# EAGLE board Replicape_A4 (EAGLE 6.5.0), part 1 of 2
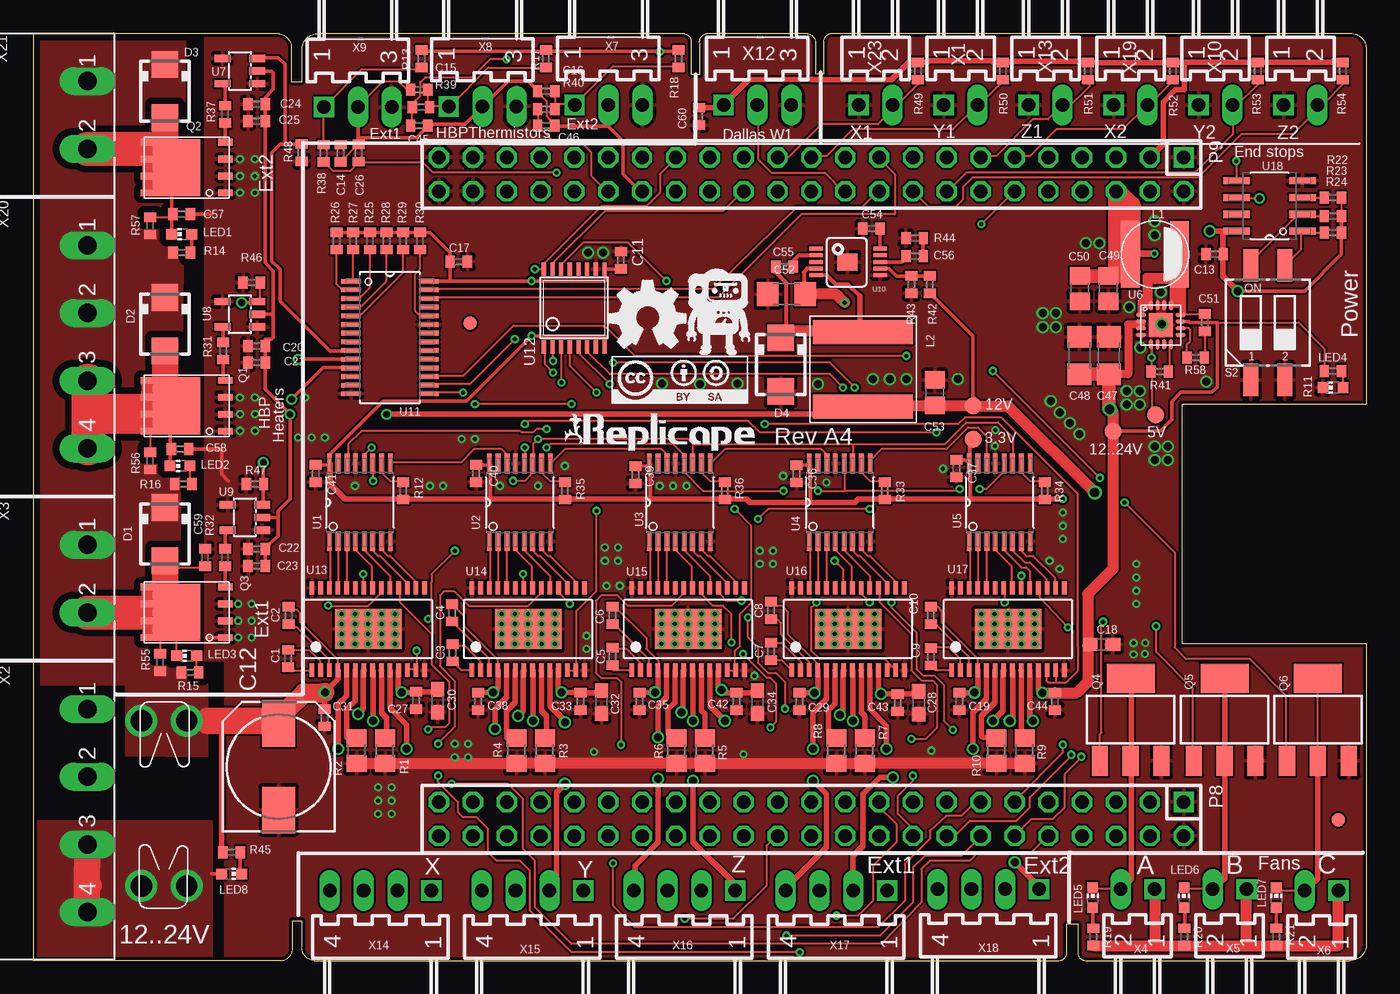
[diagram p0: board, top side]
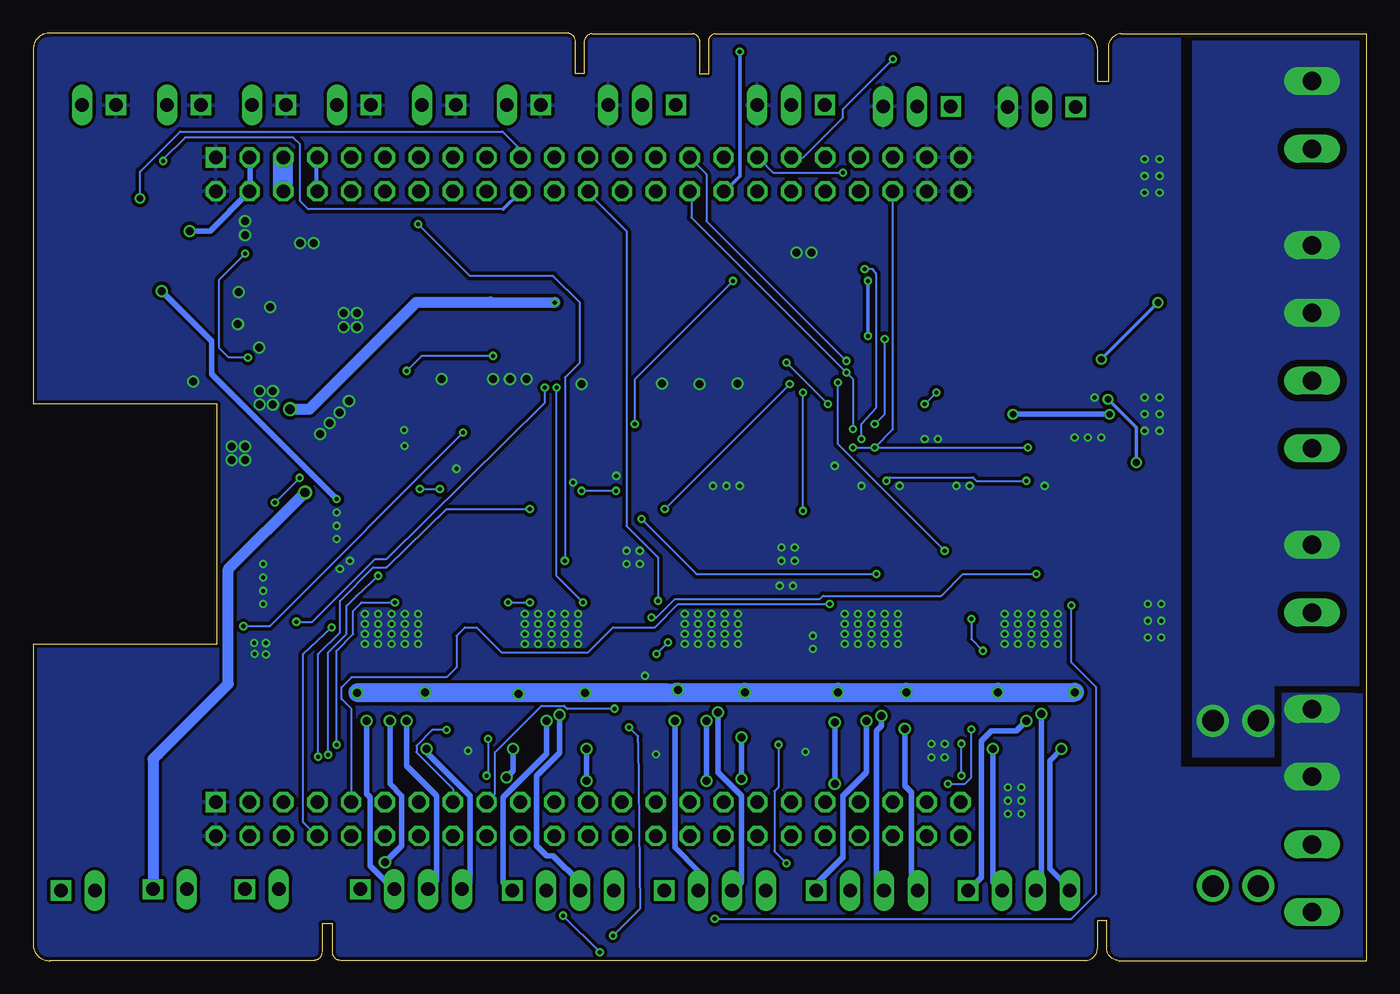
[diagram p1: board, bottom side, seen from below]

Size 100 x 69.58 mm. Coordinates in mm from the lower left corner, seen from the top.
Outline: 19.45,3 20.15,3 20.15,1.05 arc90 21.05,0 76.95,0 arc90 77.55,0.65 77.55,2.75 78.35,2.75 78.35,0.65 arc90 78.95,0 98.75,0 arc90 100,1.1 100,23.75 86.19,23.75 86.19,41.75 100,41.75 100,68.5 arc90 98.75,69.58 59.88,69.58 arc90 59.33,68.9 59.33,66.55 58.67,66.55 58.67,68.85 arc90 58.08,69.55 50.5,69.55 arc90 50,68.85 50,66.5 49.35,66.5 49.35,68.85 arc90 48.85,69.55 21.35,69.55 arc90 20.15,68.35 20.15,65.95 19.35,65.95 19.35,68.35 arc90 18.43,69.55 0,69.55 0,0 18.6,0 arc90 19.45,0.95 19.45,3
Copper layers (1*16): Top 0.035mm / dielectric 1.5mm / Bottom 0.035mm
Design rules "default": minimum track width 6mil, minimum drill 12mil, track to track 6mil, track to pad 6mil, pad to pad 6mil, via to via 6mil, smd to smd 0mil, copper to edge 10mil, drill to drill 10mil, minimum pad ring 10mil, minimum via ring 6mil, stop-mask expansion 2mil, vias tented up to drill 100mil, thermal gap 10mil
Net classes: 1 power: width 1.27 mm

## Footprints (pad centres in the part's own frame; a part is rotated, then mirrored left to right if it is on the bottom)
B1,27 = smd 1.27 x 1.27: TP 0,0
C0402 = smd 0.7 x 0.9: 1 -0.65,0; 2 0.65,0
140CLH-0810 = smd 3.5 x 2.5: + 3.25,0; - -3.25,0
C0603 = smd 1.1 x 1: 1 -0.85,0; 2 0.85,0
C1206 = smd 1.6 x 1.8: 1 -1.4,0; 2 1.4,0
C0805 = smd 1.3 x 1.5: 1 -0.95,0; 2 0.95,0
SMA = smd 2 x 2: A 2,0; C -2,0
3557 = drill 1.6: 1 -6.2,1.7; 2 -6.2,-1.7; 3 6.2,-1.7; 4 6.2,1.7
FIDUCIAL-1X2.5 = smd 1 x 1: 1 0,0
VLC5020 = smd 5 x 1.4: 1 0,1.85; 2 0,-1.85
NR8040T330 = smd 1.8 x 7.5: P$1 2.8,0; P$2 -2.8,0
CHIP-LED0603 = smd 0.8 x 0.8: A 0,-0.75; C 0,0.75
DIL-100-2X23 = drill 1.016 square: 1 -27.94,-1.27 | drill 1.016 octagon: 2 -27.94,1.27; 3 -25.4,-1.27; 4 -25.4,1.27; 5 -22.86,-1.27; 6 -22.86,1.27; 7 -20.32,-1.27; 8 -20.32,1.27; 9 -17.78,-1.27; 10 -17.78,1.27; 11 -15.24,-1.27; 12 -15.24,1.27; 13 -12.7,-1.27; 14 -12.7,1.27; 15 -10.16,-1.27; 16 -10.16,1.27; 17 -7.62,-1.27; 18 -7.62,1.27; 19 -5.08,-1.27; 20 -5.08,1.27; 21 -2.54,-1.27; 22 -2.54,1.27; 23 0,-1.27; 24 0,1.27; 25 2.54,-1.27; 26 2.54,1.27; 27 5.08,-1.27; 28 5.08,1.27; 29 7.62,-1.27; 30 7.62,1.27; 31 10.16,-1.27; 32 10.16,1.27; 33 12.7,-1.27; 34 12.7,1.27; 35 15.24,-1.27; 36 15.24,1.27; 37 17.78,-1.27; 38 17.78,1.27; 39 20.32,-1.27; 40 20.32,1.27; 41 22.86,-1.27; 42 22.86,1.27; 43 25.4,-1.27; 44 25.4,1.27; 45 27.94,-1.27; 46 27.94,1.27
8-DFN-EP-(5X6) = smd 1.1 x 0.5: 1 -2.9,1.905; 2 -2.9,0.635; 3 -2.9,-0.635; 4 -2.9,-1.905; 5 2.9,-1.905; 6 2.9,-0.635; 7 2.9,0.635; 8 2.9,1.905 | smd 3.5 x 4.3: TH 0.75,0
SOT223 = smd 1.219 x 2.235: 1 -2.311,-3.099; 2 0,-3.099; 3 2.311,-3.099 | smd 3.6 x 2.2: 4 0,3.099
R0805 = smd 1.3 x 1.5: 1 -0.95,0; 2 0.95,0
R0402 = smd 0.7 x 0.9: 1 -0.65,0; 2 0.65,0
CTS-219-02 = smd 1.13 x 2.44: 1 -1.27,-4.3; 2 1.27,-4.3; 3 1.27,4.3; 4 -1.27,4.3
SOP65P640X120-16N = smd 1.473 x 0.356: 1 -2.921,2.286; 2 -2.921,1.626; 3 -2.921,0.965; 4 -2.921,0.33; 5 -2.921,-0.33; 6 -2.921,-0.965; 7 -2.921,-1.626; 8 -2.921,-2.286; 9 2.921,-2.286; 10 2.921,-1.626; 11 2.921,-0.965; 12 2.921,-0.33; 13 2.921,0.33; 14 2.921,0.965; 15 2.921,1.626; 16 2.921,2.286
QFN-16 = smd 0.75 x 0.3: 1 -1.475,0.75; 2 -1.475,0.25; 3 -1.475,-0.25; 4 -1.475,-0.75; 9 1.475,-0.75; 10 1.475,-0.25; 11 1.475,0.25; 12 1.475,0.75 | smd 0.3 x 0.75: 5 -0.75,-1.475; 6 -0.25,-1.475; 7 0.25,-1.475; 8 0.75,-1.475; 13 0.75,1.475; 14 0.25,1.475; 15 -0.25,1.475; 16 -0.75,1.475 | smd 1.8 x 1.8: P$17 0,0
SOT23-5L = smd 0.55 x 1.2: 1 -0.95,-1.3; 2 0,-1.3; 3 0.95,-1.3; 4 0.95,1.3; 5 -0.95,1.3
MSOP10 = smd 0.3 x 1: 1 -1,-2.4; 2 -0.5,-2.4; 3 0.005,-2.4; 4 0.5,-2.4; 5 1,-2.4; 6 1,2.4; 7 0.5,2.4; 8 0.005,2.4; 9 -0.5,2.4; 10 -1,2.4 | smd 1.3 x 1.5: EP 0.02,-0.04
SOP65P640X110-28N = smd 1.473 x 0.356: 1 -2.921,4.216; 2 -2.921,3.581; 3 -2.921,2.921; 4 -2.921,2.286; 5 -2.921,1.626; 6 -2.921,0.965; 7 -2.921,0.33; 8 -2.921,-0.33; 9 -2.921,-0.965; 10 -2.921,-1.626; 11 -2.921,-2.286; 12 -2.921,-2.921; 13 -2.921,-3.581; 14 -2.921,-4.216; 15 2.921,-4.216; 16 2.921,-3.581; 17 2.921,-2.921; 18 2.921,-2.286; 19 2.921,-1.626; 20 2.921,-0.965; 21 2.921,-0.33; 22 2.921,0.33; 23 2.921,0.965; 24 2.921,1.626; 25 2.921,2.286; 26 2.921,2.921; 27 2.921,3.581; 28 2.921,4.216
TSSOP-16 = smd 0.305 x 0.991: 1 -2.275,-2.918; 2 -1.625,-2.918; 3 -0.975,-2.918; 4 -0.325,-2.918; 5 0.325,-2.918; 6 0.975,-2.918; 7 1.625,-2.918; 8 2.275,-2.918; 9 2.275,2.918; 10 1.625,2.918; 11 0.975,2.918; 12 0.325,2.918; 13 -0.325,2.918; 14 -0.975,2.918; 15 -1.625,2.918; 16 -2.275,2.918
TSSOP-28 = smd 0.35 x 1: 1 -4.225,-3.087; 2 -3.575,-3.087; 3 -2.925,-3.087; 4 -2.275,-3.087; 5 -1.625,-3.087; 6 -0.975,-3.087; 7 -0.325,-3.087; 8 0.325,-3.087; 9 0.975,-3.087; 10 1.625,-3.087; 11 2.275,-3.087; 12 2.925,-3.087; 13 3.575,-3.087; 14 4.225,-3.087; 15 4.225,3.087; 16 3.575,3.087; 17 2.925,3.087; 18 2.275,3.087; 19 1.625,3.087; 20 0.975,3.087; 21 0.325,3.087; 22 -0.325,3.087; 23 -0.975,3.087; 24 -1.625,3.087; 25 -2.275,3.087; 26 -2.925,3.087; 27 -3.575,3.087; 28 -4.225,3.087 | smd 5 x 3: EXP 0,0
SOIC127P600X175-8N = smd 1.981 x 0.533: 1 -2.464,1.905; 2 -2.464,0.635; 3 -2.464,-0.635; 4 -2.464,-1.905; 5 2.464,-1.905; 6 2.464,-0.635; 7 2.464,0.635; 8 2.464,1.905
7395-02 = drill 1.016 square: 1 1.27,0 | drill 1.016 long: 2 -1.27,0
MSTBA4 = drill 1.397 long: 1 -7.62,5.08; 2 -2.54,5.08; 3 2.54,5.08; 4 7.62,5.08
MSTBA2 = drill 1.397 long: 1 -2.54,5.08; 2 2.54,5.08
7395-03 = drill 1.016 square: 1 2.54,0 | drill 1.016 long: 2 0,0; 3 -2.54,0
7395-04 = drill 1.016 square: 1 3.81,0 | drill 1.016 long: 2 1.27,0; 3 -1.27,0; 4 -3.81,0

## Placement (x,y rotation side)
3.3V  TPB1,27  [B1,27]  70.5,39.13 0 top
5V  TPB1,27  [B1,27]  84.2,40.95 0 top
12..24V  TPB1,27  [B1,27]  81,39.7 0 top
12V  TPB1,27  [B1,27]  70.5,41.63 0 top
C1  10nF  [C0402]  19.12,22.66 270 top
C2  0.1uF  [C0402]  19.15,25.9 270 top
C3  10nF  [C0402]  31.45,23.1 270 top
C4  0.1uF  [C0402]  31.43,26.1 270 top
C5  10nF  [C0402]  43.45,22.83 270 top
C6  0.1uF  [C0402]  43.46,25.9 270 top
C7  10nF  [C0402]  55.35,23.2 270 top
C8  0.1uF  [C0402]  55.35,26.28 270 top
C9  10nF  [C0402]  67.35,22.8 270 top
C10  0.1uF  [C0402]  67.33,25.9 270 top
C11  0.1uF  [C0402]  44.08,52.55 90 top
C12  100uF  [140CLH-0810]  18.4,14.55 90 top
C13  0.1uF  [C0402]  88.62,53 180 top
C14  0.47uF  [C0402]  23.05,60.58 270 top
C15  0.47uF  [C0402]  28.95,65.35 180 top
C16  0.47uF  [C0402]  38.48,65.23 180 top
C17  0.1uF  [C0402]  31.92,52.43 0 top
C18  4.7uF  [C0603]  80.14,23.72 0 top
C19  0.1uF  [C0402]  69.47,19.45 270 top
C20  0.1uF  [C0402]  16.75,46.13 180 top
C21  4.7uF  [C0402]  16.75,44.88 180 top
C22  0.1uF  [C0402]  16.75,30.88 180 top
C23  4.7uF  [C0402]  16.75,29.63 180 top
C24  0.1uF  [C0402]  16.75,64.25 180 top
C25  4.7uF  [C0402]  16.75,63 180 top
C26  0.47uF  [C0402]  24.4,60.6 90 top
C27  0.1uF  [C0402]  28.71,19.52 270 top
C28  4.7uF  [C0603]  66.42,19.35 270 top
C29  0.1uF  [C0402]  57.48,19.45 270 top
C30  4.7uF  [C0603]  30.32,19.5 270 top
C31  0.1uF  [C0402]  21.84,18.23 270 top
C32  4.7uF  [C0603]  42.62,19.4 270 top
C33  0.1uF  [C0402]  41.05,19.45 270 top
C34  4.7uF  [C0603]  54.33,19.4 270 top
C35  0.1uF  [C0402]  45.48,19.45 270 top
C36  0.1uF  [C0402]  57.27,36.52 270 top
C37  0.1uF  [C0402]  69.27,36.93 270 top
C38  0.1uF  [C0402]  33.38,19.45 270 top
C39  0.1uF  [C0402]  45.17,36.44 270 top
C40  0.1uF  [C0402]  33.22,36.55 270 top
C41  0.1uF  [C0402]  21.2,36.55 270 top
C42  0.1uF  [C0402]  52.75,19.45 270 top
C43  0.1uF  [C0402]  64.85,19.35 270 top
C44  0.1uF  [C0402]  76.65,19.45 270 top
C45  0.47uF  [C0402]  28.95,62.65 0 top
C46  0.47uF  [C0402]  38.48,62.65 0 top
C47  10uF  [C1206]  78.47,45.4 90 top
C48  10uF  [C1206]  80.7,45.4 90 top
C49  22uF  [C0805]  80.65,50.43 270 top
C50  22uF  [C0805]  78.5,50.43 270 top
C51  22nF  [C0402]  87.9,47.88 90 top
C52  10uF  [C1206]  56.5,50 180 top
C53  22uF  [C0805]  67.62,42.63 90 top
C54  10nF  [C0402]  62.88,54.93 180 top
C55  10nF  [C0402]  56.35,52.08 180 top
C56  1nF  [C0402]  66.12,52.85 0 top
C57  4.7nF  [C0402]  11.12,56 0 top
C58  4.7nF  [C0402]  11,38.38 0 top
C59  4.7nF  [C0402]  12.88,30.25 90 top
C60  0.47uF  [C0402]  49.96,63.35 270 top
D1  MBRA340T3  [SMA]  9.88,32 270 top
D2  MBRA340T3  [SMA]  9.88,47.75 270 top
D3  MBRA340T3  [SMA]  9.88,65.25 270 top
D4  MBRA340T3  [SMA]  56.08,44.73 270 top
F1  FUSE3557  [3557]  9.8,11.8 90 top
JP1  FIDUCIAL1X2.5  [FIDUCIAL-1X2.5]  32.77,47.83 0 top
JP2  FIDUCIAL1X2.5  [FIDUCIAL-1X2.5]  97.9,10.55 0 top
L1  4.7uH  [VLC5020]  84.15,53 270 top
L2  33uH  [NR8040T330]  62.25,44.38 270 top
LED1  blue  [CHIP-LED0603]  11.12,54.5 90 top
LED2  blue  [CHIP-LED0603]  11,37.13 90 top
LED3  blue  [CHIP-LED0603]  11.5,22.88 90 top
LED4  blue  [CHIP-LED0603]  97.5,43 90 top
LED5  blue  [CHIP-LED0603]  79.47,4.73 0 top
LED6  blue  [CHIP-LED0603]  86.33,4.73 0 top
LED7  blue  [CHIP-LED0603]  93.25,4.73 0 top
LED8  red  [CHIP-LED0603]  14.88,6.5 270 top
LOGO1  OSHW_LOGO_FILLX0200-NT  [OSHW_FILLX200_NOTEXT]  43.26,45.96 0 top
P8  F-2X23-  [DIL-100-2X23]  58.38,10.63 180 top
P9  F-2X23-  [DIL-100-2X23]  58.38,59 180 top
Q1  AON6758  [8-DFN-EP-(5X6)]  11.5,41.63 180 top
Q2  AON6758  [8-DFN-EP-(5X6)]  11.5,59.5 180 top
Q3  AON6758  [8-DFN-EP-(5X6)]  11.5,26.13 180 top
Q4  NIF5002  [SOT223]  82.33,18.08 0 top
Q5  NIF5002  [SOT223]  89.38,18.08 0 top
Q6  NIF5002  [SOT223]  96.38,18.08 0 top
R1  0.1R  [R0805]  26.38,15.75 90 top
R2  0.1R  [R0805]  24.25,15.75 90 top
R3  0.1R  [R0805]  38.38,15.75 90 top
R4  0.1R  [R0805]  36.25,15.75 90 top
R5  0.1R  [R0805]  50.38,15.75 90 top
R6  0.1R  [R0805]  48.25,15.75 90 top
R7  0.1R  [R0805]  62.38,15.75 90 top
R8  0.1R  [R0805]  60.25,15.75 90 top
R9  0.1R  [R0805]  74.38,15.75 90 top
R10  0.1R  [R0805]  72.25,15.75 90 top
R11  4.7K  [R0402]  97.5,44.25 180 top
R12  4.7K  [R0402]  27.75,35.25 270 top
R13  4K7, 1%  [R0402]  29.12,67.68 90 top
R14  4.7K  [R0402]  11.12,53.13 180 top
R15  4.7K  [R0402]  11.75,21.63 180 top
R16  4.7K  [R0402]  11.25,35.75 180 top
R17  4K7, 1%  [R0402]  38.45,67.68 90 top
R18  4K7, 1%  [R0402]  48.4,67.68 90 top
R19  4.7K  [R0402]  79.53,1.78 270 top
R20  4.7K  [R0402]  86.35,1.78 270 top
R21  4.7K  [R0402]  93.25,1.78 270 top
R22  4.7K  [R0402]  97.5,57.25 0 top
R23  4.7K  [R0402]  97.5,55.88 0 top
R24  4.7K  [R0402]  97.5,54.63 0 top
R25  4.7K  [R0402]  25.25,54 90 top
R26  4.7K  [R0402]  22.75,54 90 top
R27  4.7K  [R0402]  24,54 90 top
R28  4.7K  [R0402]  26.5,54 90 top
R29  4.7K  [R0402]  27.75,54 90 top
R30  4.7K  [R0402]  29,54 90 top
R31  100R  [R0402]  14.25,45.75 90 top
R32  100R  [R0402]  14.38,30.25 90 top
R33  4.7K  [R0402]  63.88,35.25 270 top
R34  4.7K  [R0402]  75.88,35.25 270 top
R35  4.7K  [R0402]  39.88,35.25 270 top
R36  4.7K  [R0402]  51.88,35.25 270 top
R37  100R  [R0402]  14.38,63.5 90 top
R38  6.8K  [R0402]  21.77,60.58 270 top
R39  6.8K  [R0402]  29.07,64.05 180 top
R40  6.8K  [R0402]  38.48,63.88 180 top
R41  10K  [R0402]  84.5,44.2 180 top
R42  120K  [R0402]  67.25,50.73 90 top
R43  10K  [R0402]  65.88,50.73 270 top
R44  40K  [R0402]  66.12,54.23 180 top
R45  4.7K  [R0402]  14.88,8.13 0 top
R46  4.7K  [R0402]  16.38,50.88 0 top
R47  4.7K  [R0402]  16.62,35.75 0 top
R48  4.7K  [R0402]  20.12,60.63 90 top
R49  1k  [R0402]  66.38,66.75 90 top
R50  1k  [R0402]  72.75,66.75 90 top
R51  1k  [R0402]  79.12,66.75 90 top
R52  1k  [R0402]  85.5,66.75 90 top
R53  1k  [R0402]  91.88,66.75 90 top
R54  1k  [R0402]  98.25,66.75 90 top
R55  4.7K  [R0402]  9.5,22.38 270 top
R56  4.7K  [R0402]  8.75,37.5 270 top
R57  4.7K  [R0402]  8.75,55.13 270 top
R58  100R  [R0402]  87.2,45.25 180 top
S2  219-02  [CTS-219-02]  92.62,47.88 0 top
U1  SN74AHC595PW  [SOP65P640X120-16N]  24.5,34.38 90 top
U2  SN74AHC595PW  [SOP65P640X120-16N]  36.5,34.38 90 top
U3  SN74AHC595PW  [SOP65P640X120-16N]  48.5,34.38 90 top
U4  SN74AHC595PW  [SOP65P640X120-16N]  60.5,34.38 90 top
U5  SN74AHC595PW  [SOP65P640X120-16N]  72.5,34.38 90 top
U6  MCP16321  [QFN-16]  84.6,47.7 0 top
U7  MCP1402  [SOT23-5L]  15.5,66.75 90 top
U8  MCP1402  [SOT23-5L]  15.5,48.5 90 top
U9  MCP1402  [SOT23-5L]  15.88,33.25 90 top
U10  RT8268  [MSOP10]  61.12,52.43 270 top
U11  PCA9685PW  [SOP65P640X110-28N]  26.75,46.75 0 top
U12  DAC088S085  [TSSOP-16]  40.58,48.98 0 top
U13  DRV8825PWP  [TSSOP-28]  25.12,24.88 0 top
U14  DRV8825PWP  [TSSOP-28]  37.12,24.88 0 top
U15  DRV8825PWP  [TSSOP-28]  49.12,24.88 0 top
U16  DRV8825PWP  [TSSOP-28]  61.12,24.88 0 top
U17  DRV8825PWP  [TSSOP-28]  73.12,24.88 0 top
U18  CAT24C256  [SOIC127P600X175-8N]  92.75,56.63 180 top
U$1  [LOGO_BIG]  50.95,48.75 0 top
U$2  REPLICAPE-LOGO  [REPLICAPE-LOGO]  39.47,37.69 0 top
X1  22-05-7028-02  [7395-02]  69.58,64.2 180 top
X2  MSTBA4  [MSTBA4]  -1.02,11.25 270 top
X3  MSTBA2  [MSTBA2]  -1.02,28.65 270 top
X4  22-05-7028-02  [7395-02]  82.85,5.35 0 top
X5  22-05-7028-02  [7395-02]  89.75,5.35 0 top
X6  22-05-7028-02  [7395-02]  96.65,5.25 0 top
X7  22-05-7038-03  [7395-03]  43.15,64.2 180 top
X8  22-05-7038-03  [7395-03]  33.7,64.1 180 top
X9  22-05-7038-03  [7395-03]  24.35,64.05 180 top
X10  22-05-7028-02  [7395-02]  88.7,64.2 180 top
X11  22-05-7028-02  [7395-02]  95.08,64.2 180 top
X12  22-05-7038-03  [7395-03]  54.33,64.2 180 top
X13  22-05-7028-02  [7395-02]  75.95,64.2 180 top
X14  22-05-7048-04  [7395-04]  26.05,5.25 0 top
X15  22-05-7048-04  [7395-04]  37.45,5.25 0 top
X16  22-05-7048-04  [7395-04]  48.85,5.25 0 top
X17  22-05-7048-04  [7395-04]  60.25,5.25 0 top
X18  22-05-7048-04  [7395-04]  71.65,5.35 0 top
X19  22-05-7028-02  [7395-02]  82.33,64.2 180 top
X20  MSTBA4  [MSTBA4]  -1.02,46.05 270 top
X21  MSTBA2  [MSTBA2]  -1.02,63.45 270 top
X23  22-05-7028-02  [7395-02]  63.2,64.2 180 top

## Library data of the parts
3.3V 5V 12..24V 12V = testpad
C1-C60 R1-R48 R55-R58 = rcl
D1-D4 = diode
F1 = fuse
JP1 JP2 L2 U6 U10 = SparkFun
L1 = resistor
LED1-LED8 = led
LOGO1 = ohw-logo
P8 P9 = con-headers-jp
Q1-Q6 = transistor-power
R49-R54 = rcl-2
S2 = switch-dil; OC_FARNELL: unknown; OC_NEWARK: unknown
U1-U5 = sn74hc595; MPN: SN74AHC595PW; OC_FARNELL: 1741463; OC_NEWARK: 50R5930; PACKAGE: TSSOP-16; SUPPLIER: Texas Instruments
U7-U9 = microchip-6
U11 = custom; MPN: PCA9685PW; OC_FARNELL: 1854074; OC_NEWARK: 19T6398; PACKAGE: TSSOP-28; SUPPLIER: NXP
U12 = dac88s
U13-U17 = drv88xx
U18 U$1 = custom
U$2 = replicape
X1 X4-X6 X10 X11 X13 X19 X23 = con-molex; OC_FARNELL: 9731601; OC_NEWARK: unknown
X2 X3 X20 X21 = con-phoenix-508
X7-X9 X12 X14-X18 = con-molex; OC_FARNELL: unknown; OC_NEWARK: unknown

## Nets
+3V3: 3.3V.TP C11.1 C13.1 C17.1 C36.1 C37.1 C39.1 C40.1 C41.1 C60.1 P9.3 P9.4 R12.2 R22.2 R23.2 R24.2 R25.2 R26.2 R27.2 R28.2 R29.2 R30.2 R33.2 R34.2 R35.2 R36.2 R49.2 R50.2 R51.2 R52.2 R53.2 R54.2 U1.16 U2.16 U3.16 U4.16 U5.16 U11.28 U12.7 U12.8 U12.9 U18.8 X12.1
AGND: C14.2 C15.2 C16.2 C26.2 C45.2 C46.2 P9.34 X7.2 X8.2 X9.2
DALLAS_W1: P9.22 X12.2
DIR_EXT1: P8.15 U16.20
DIR_EXT2: P8.16 U17.20
DIR_X: P8.26 U13.20
DIR_Y: P8.19 U14.20
DIR_Z: P8.14 U15.20
END_STOP_X_1: P9.25 R49.1 X23.2
END_STOP_X_2: P9.11 R52.1 X19.2
END_STOP_Y_1: P9.23 R50.1 X1.2
END_STOP_Y_2: P9.16 R53.1 X10.2
END_STOP_Z_1: P9.13 R51.1 X13.2
END_STOP_Z_2: P9.18 R54.1 X11.2
EXT1_DECAY: U4.5 U16.19
EXT1_MODE0: U4.3 U16.24
EXT1_MODE1: U4.2 U16.25
EXT1_MODE2: U4.1 U16.26
EXT1_NENABLE: U4.4 U16.21
EXT1_NRESET: U4.7 U16.16
EXT1_NSLEEP: U4.6 U16.17
EXT2_DECAY: U5.5 U17.19
EXT2_MODE0: U5.3 U17.24
EXT2_MODE1: U5.2 U17.25
EXT2_MODE2: U5.1 U17.26
EXT2_NENABLE: U5.4 U17.21
EXT2_NRESET: U5.7 U17.16
EXT2_NSLEEP: U5.6 U17.17
FAN_1: Q4.1 U11.15
FAN_2: Q5.1 U11.16
FAN_3: Q6.1 U11.17
FAULT_EXT1: P8.18 U16.18
FAULT_EXT2: P8.8 U17.18
FAULT_X: P8.10 U13.18
FAULT_Y: P8.9 U14.18
FAULT_Z: P9.24 U15.18
GND: C11.2 C12.- C13.2 C17.2 C18.2 C19.2 C20.2 C21.2 C22.2 C23.2 C24.2 C25.2 C27.2 C28.2 C29.2 C30.2 C31.2 C32.2 C33.2 C34.2 C35.2 C36.2 C37.2 C38.2 C39.2 C40.2 C41.2 C42.2 C43.2 C44.2 C47.2 C48.2 C49.2 C50.2 C52.2 C53.2 C54.2 C57.2 C58.2 C59.2 C60.2 D4.A LED4.C P8.1 P8.2 P9.1 P9.2 P9.43 P9.44 P9.45 P9.46 Q1.1 Q1.2 Q1.3 Q2.1 Q2.2 Q2.3 Q3.1 Q3.2 Q3.3 Q4.3 Q5.3 Q6.3 R1.1 R2.1 R3.1 R4.1 R5.1 R6.1 R7.1 R8.1 R9.1 R10.1 R43.2 R44.2 R46.1 R47.1 R48.1 S2.1 S2.2 U1.8 U1.13 U2.8 U2.13 U3.8 U3.13 U4.8 U4.13 U5.8 U5.13 U6.4 U6.14 U6.15 U6.P$17 U7.1 U7.4 U8.1 U8.4 U9.1 U9.4 U10.6 U10.EP U11.14 U11.23 U12.10 U13.14 U13.28 U13.EXP U14.14 U14.28 U14.EXP U15.14 U15.28 U15.EXP U16.14 U16.28 U16.EXP U17.14 U17.28 U17.EXP U18.4 X1.1 X2.1 X2.2 X7.3 X8.3 X9.3 X10.1 X11.1 X12.3 X13.1 X19.1 X23.1
HEATER_EXT1: R47.2 U9.3 U11.11
HEATER_EXT2: R48.2 U7.3 U11.9
HEATER_HBP: R46.2 U8.3 U11.10
I2C2_SCL: P9.19 U11.26 U18.6
I2C2_SDA: P9.20 U11.27 U18.5
N$1: C51.1 R58.1
N$8: LED8.C R45.2
N$9: LED5.A R19.1
N$16: C1.1 U13.2
N$17: C1.2 U13.1
N$18: R1.2 U13.9
N$19: R2.2 U13.6
N$21: R32.2 U9.5
N$22: C2.2 U13.3
N$23: Q2.4 R37.1
N$34: C3.1 U14.2
N$35: C3.2 U14.1
N$36: R3.2 U14.9
N$37: R4.2 U14.6
N$38: C4.2 U14.3
N$41: R37.2 U7.5
N$52: C5.1 U15.2
N$53: C5.2 U15.1
N$54: R5.2 U15.9
N$55: R6.2 U15.6
N$56: C6.2 U15.3
N$58: R27.1 U11.1
N$59: R26.1 U11.2
N$60: Q1.4 R31.1
N$61: R31.2 U8.5
N$64: C57.1 D3.A LED1.C Q2.5 Q2.6 Q2.7 Q2.8 Q2.TH R57.1 X21.2
N$70: C7.1 U16.2
N$71: C7.2 U16.1
N$72: R7.2 U16.9
N$73: R8.2 U16.6
N$74: C8.2 U16.3
N$76: R25.1 U11.3
N$88: C9.1 U17.2
N$89: C9.2 U17.1
N$90: R9.2 U17.9
N$91: R10.2 U17.6
N$92: C10.2 U17.3
N$94: R28.1 U11.4
N$95: R29.1 U11.5
N$96: LED4.A R11.1
N$97: R12.1 U1.10
N$98: R33.1 U4.10
N$99: R34.1 U5.10
N$100: R35.1 U2.10
N$101: R36.1 U3.10
N$112: R30.1 U11.24
N$114: LED7.C Q6.2 Q6.4 X6.2
N$115: LED6.C Q5.2 Q5.4 X5.2
N$116: LED5.C Q4.2 Q4.4 X4.2
N$117: LED6.A R20.1
N$118: LED7.A R21.1
N$127: LED3.A R15.1
N$128: R58.2 U6.10
N$129: LED1.A R14.1
N$130: LED2.A R16.1
N$133: Q3.4 R32.1
N$147: R24.1 S2.3 U18.1
N$148: R23.1 S2.4 U18.2
N$149: R22.1 U18.3
N$233: R42.2 R43.1 U10.7
N$234: C59.1 D1.A LED3.C Q3.5 Q3.6 Q3.7 Q3.8 Q3.TH R55.1 X3.2
N$237: C14.1 R13.1 R38.1 X9.1
N$238: C55.2 D4.C L2.P$2 U10.5
N$239: R41.1 U6.8
N$240: C16.1 R18.1 R40.1 X7.1
N$241: C15.1 R17.1 R39.1 X8.1
N$242: C58.1 D2.A LED2.C Q1.5 Q1.6 Q1.7 Q1.8 Q1.TH R56.1 X20.3 X20.4
N$243: C54.1 U10.10
N$244: C56.1 U10.8
N$245: C55.1 U10.2
N$246: C56.2 R44.1
SER_2: U1.9 U2.14
SER_3: U2.9 U3.14
SER_4: U3.9 U4.14
SER_5: U4.9 U5.14
SPI1_CS0: P9.28 U12.15
SPI1_CS1: P9.42 U1.12 U2.12 U3.12 U4.12 U5.12
SPI1_MISO: P9.29 U12.2
SPI1_MOSI: P9.30 U1.14 U12.1
SPI1_SCLK: P9.31 U1.11 U2.11 U3.11 U4.11 U5.11 U12.16
STEP1_EXT1: U16.5 X17.4
STEP1_EXT2: U17.5 X18.4
STEP1_X: U13.5 X14.4
STEP1_Y: U14.5 X15.4
STEP1_Z: U15.5 X16.4
STEP2_EXT1: U16.7 X17.3
STEP2_EXT2: U17.7 X18.3
STEP2_X: U13.7 X14.3
STEP2_Y: U14.7 X15.3
STEP2_Z: U15.7 X16.3
STEP3_EXT1: U16.10 X17.2
STEP3_EXT2: U17.10 X18.2
STEP3_X: U13.10 X14.2
STEP3_Y: U14.10 X15.2
STEP3_Z: U15.10 X16.2
STEP4_EXT1: U16.8 X17.1
STEP4_EXT2: U17.8 X18.1
STEP4_X: U13.8 X14.1
STEP4_Y: U14.8 X15.1
STEP4_Z: U15.8 X16.1
STEP_EXT1: P9.12 U16.22
STEP_EXT2: P8.11 U17.22
STEP_X: P8.17 U13.22
STEP_Y: P8.12 U14.22
STEP_Z: P8.13 U15.22
SW: C51.2 L1.1 U6.1 U6.12 U6.13 U6.16
SYS_5V: P9.7 P9.8
TERM_EXT1: C26.1 P9.33 R38.2
TERM_EXT2: C46.1 P9.36 R40.2
TERM_HBP: C45.1 P9.35 R39.2
VDD_5V: 5V.TP C49.1 C50.1 L1.2 P9.5 P9.6 R41.2 U6.5
VDD_12V: 12V.TP C20.1 C21.1 C22.1 C23.1 C24.1 C25.1 C53.1 L2.P$1 R19.2 R20.2 R21.2 R42.1 U7.2 U8.2 U9.2 X4.1 X5.1 X6.1
VDD_ADC: P9.32 R13.2 R17.2 R18.2
VDD_IN: 12..24V.TP C2.1 C4.1 C6.1 C8.1 C10.1 C12.+ C18.1 C19.1 C27.1 C28.1 C29.1 C30.1 C31.1 C32.1 C33.1 C34.1 C35.1 C38.1 C42.1 C43.1 C44.1 C47.1 C48.1 C52.1 D1.C D2.C D3.C F1.3 F1.4 R11.2 R14.2 R15.2 R16.2 R45.1 R55.2 R56.2 R57.2 U6.2 U6.3 U6.11 U10.4 U13.4 U13.11 U14.4 U14.11 U15.4 U15.11 U16.4 U16.11 U17.4 U17.11 X3.1 X20.1 X20.2 X21.1
VIN: F1.1 F1.2 LED8.A X2.3 X2.4
VREF_EXT1: U12.6 U16.12 U16.13
VREF_EXT2: U12.14 U17.12 U17.13
VREF_X: U12.3 U13.12 U13.13
VREF_Y: U12.4 U14.12 U14.13
VREF_Z: U12.5 U15.12 U15.13
X_DECAY: U1.5 U13.19
X_MODE0: U1.3 U13.24
X_MODE1: U1.2 U13.25
X_MODE2: U1.1 U13.26
X_NENABLE: U1.4 U13.21
X_NRESET: U1.7 U13.16
X_NSLEEP: U1.6 U13.17
Y_DECAY: U2.5 U14.19
Y_MODE0: U2.3 U14.24
Y_MODE1: U2.2 U14.25
Y_MODE2: U2.1 U14.26
Y_NENABLE: U2.4 U14.21
Y_NRESET: U2.7 U14.16
Y_NSLEEP: U2.6 U14.17
Z_DECAY: U3.5 U15.19
Z_MODE0: U3.3 U15.24
Z_MODE1: U3.2 U15.25
Z_MODE2: U3.1 U15.26
Z_NENABLE: U3.4 U15.21
Z_NRESET: U3.7 U15.16
Z_NSLEEP: U3.6 U15.17